# Altium PCB PCB1.PcbDoc
Units mil, origin at the board's own origin, x right, y up, seen from the top; angles counter-clockwise.
Board outline 6000 x 4000 mil, 2 copper layers (Top Layer, Bottom Layer); 190 components, 116 nets, 465 pads, 0 vias.
Unrouted connection lines stored in the file: 339.
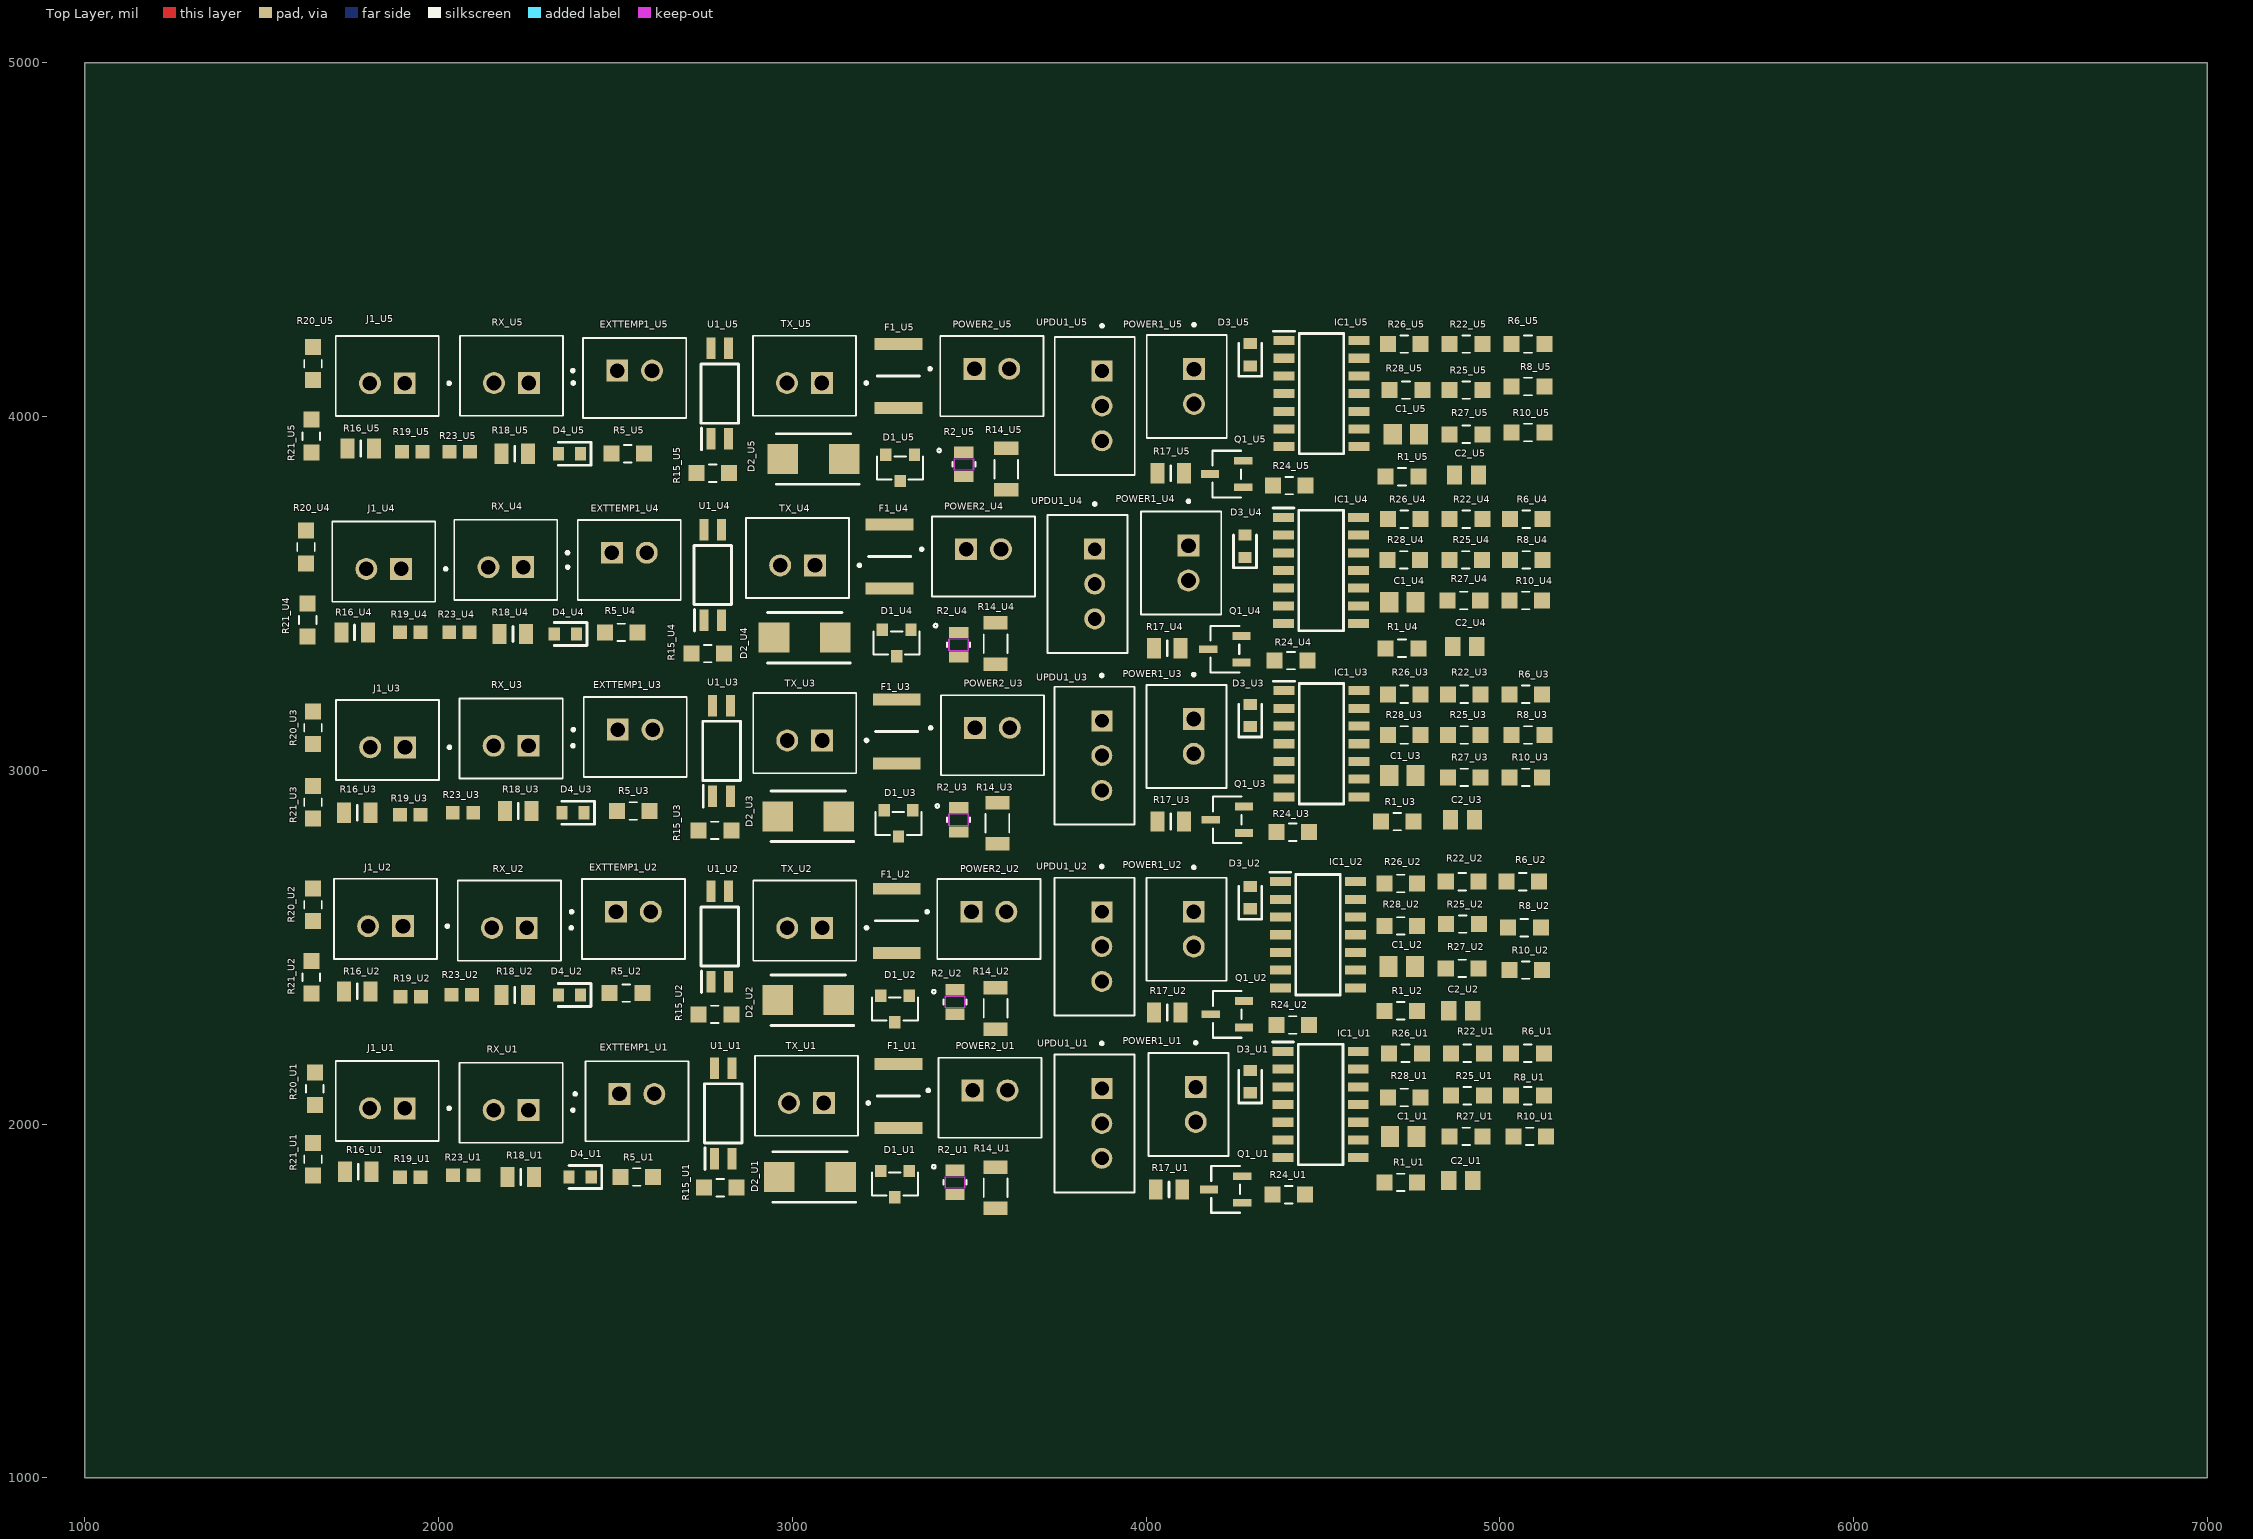
[diagram p0: Top Layer view]
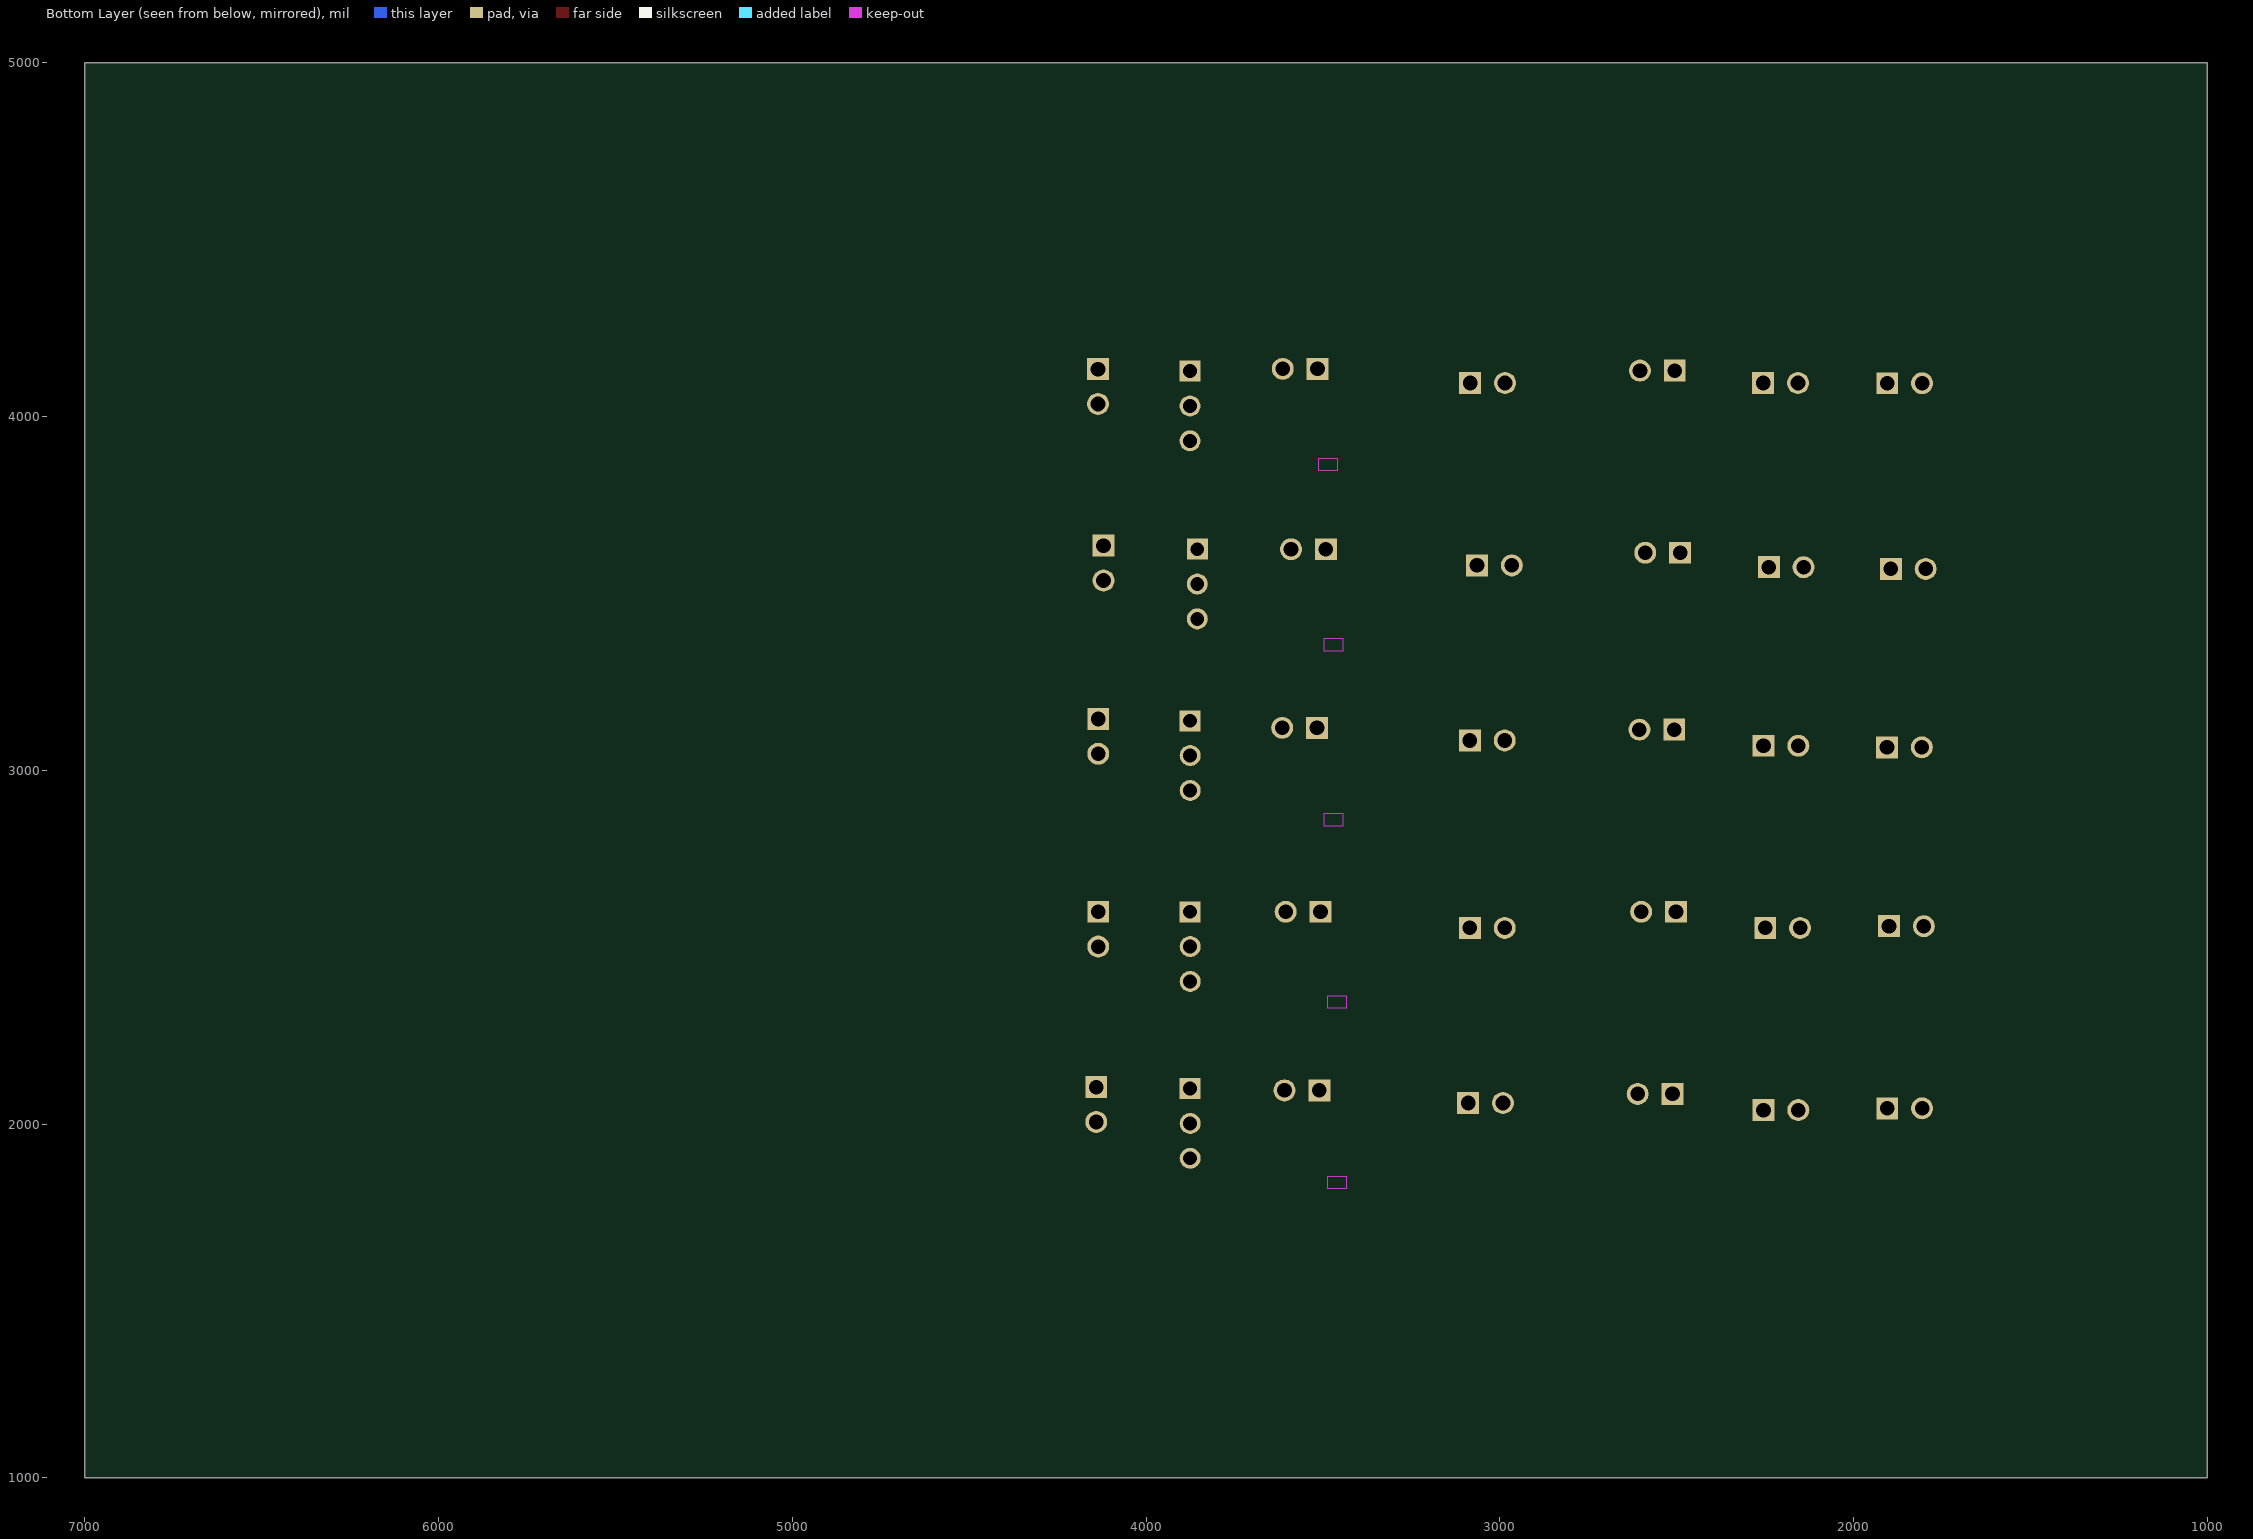
[diagram p1: Bottom Layer view, seen from below]

## Layer stack, top to bottom
Top Solder: solder mask 0.4, Solder Resist, Dk 3.5
Top Layer: signal copper 1.4
Dielectric 1: dielectric 12.6, FR-4, Dk 4.8
Bottom Layer: signal copper 1.4
Bottom Solder: solder mask 0.4, Solder Resist, Dk 3.5

## Board outline
1000,1000 7000,1000 7000,5000 1000,5000

## Design rules (kind name [scope] priority, off if disabled: settings)
Clearance [All] p1: gap=10 ignorepadtopadclearanceinfootprint=FALSE except(0: Arc-Hole Track-Hole SMDPad-Hole THPad-Hole Via-Hole Fill-Hole Poly-Hole Region-Hole Text-Hole)
PolygonConnect [All] p1: connectstyle=Relief reliefconductorwidth=10 reliefentries=4 polygonreliefangle="90 Angle" airgapwidth=10
RoutingVias [All] p1: holewidth=28 width=50 viastyle="Through Hole" minholewidth=28 minwidth=50 maxholewidth=28 maxwidth=50
SolderMaskExpansion [All] p1: expansion=4 istentingtop=FALSE
Width [All] p1: maxlimit=10 minlimit=10 preferedwidth=10
30 further rules are at their usual default settings.

## Classes and differential pairs
channel class "Single cell module": U1 U2 U3 U4 U5

## Components (designator, comment, footprint, x,y, rotation, side; value= is the part's Value field where it differs from the comment)
C1_U1 "CC0805KRX7R9BB104" CAPC2012X70 4727.6,1965 r180 top (schematic designator C1)
C1_U2 "CC0805KRX7R9BB104" CAPC2012X70 4722.6,2445 r180 top (schematic designator C1)
C1_U3 "CC0805KRX7R9BB104" CAPC2012X70 4725,2985 r180 top (schematic designator C1)
C1_U4 "CC0805KRX7R9BB104" CAPC2012X70 4725,3475 r180 top (schematic designator C1)
C1_U5 "CC0805KRX7R9BB104" CAPC2012X70 4735,3950 r180 top (schematic designator C1)
C2_U1 "CL21A106KAYNNNE" CAPC2012X135N 4890,1840 r180 top (schematic designator C2)
C2_U2 "CL21A106KAYNNNE" CAPC2012X135N 4890,2320 r180 top (schematic designator C2)
C2_U3 "CL21A106KAYNNNE" CAPC2012X135N 4895,2860 r180 top (schematic designator C2)
C2_U4 "CL21A106KAYNNNE" CAPC2012X135N 4901.02,3350 r180 top (schematic designator C2)
C2_U5 "CL21A106KAYNNNE" CAPC2012X135N 4906.02,3835 r180 top (schematic designator C2)
D1_U1 "AZ432ANTR-E1" SOT-23_DIO 3290,1830 r180 top (schematic designator D1)
D1_U2 "AZ432ANTR-E1" SOT-23_DIO 3290,2325 r180 top (schematic designator D1)
D1_U3 "AZ432ANTR-E1" SOT-23_DIO 3300,2850 r180 top (schematic designator D1)
D1_U4 "AZ432ANTR-E1" SOT-23_DIO 3295,3360 r180 top (schematic designator D1)
D1_U5 "AZ432ANTR-E1" SOT-23_DIO 3305,3855 r180 top (schematic designator D1)
D2_U1 "SM6T6V8A" DIOM5436X265N 3050,1850 r180 top (schematic designator D2)
D2_U2 "SM6T6V8A" DIOM5436X265N 3045,2350 r180 top (schematic designator D2)
D2_U3 "SM6T6V8A" DIOM5436X265N 3045,2870 r180 top (schematic designator D2)
D2_U4 "SM6T6V8A" DIOM5436X265N 3035,3375 r180 top (schematic designator D2)
D2_U5 "SM6T6V8A" DIOM5436X265N 3060,3880 r180 top (schematic designator D2)
D3_U1 "19-217_GHC-YR1S2_3T" LEDC1608X50N 4295,2120 r90 top (schematic designator D3)
D3_U2 "19-217_GHC-YR1S2_3T" LEDC1608X50N 4295,2640 r90 top (schematic designator D3)
D3_U3 "19-217_GHC-YR1S2_3T" LEDC1608X50N 4295,3155 r90 top (schematic designator D3)
D3_U4 "19-217_GHC-YR1S2_3T" LEDC1608X50N 4280,3633.5 r90 top (schematic designator D3)
D3_U5 "19-217_GHC-YR1S2_3T" LEDC1608X50N 4295,4175 r90 top (schematic designator D3)
D4_U1 "19-217_GHC-YR1S2_3T" LEDC1608X50N 2400,1850 r180 top (schematic designator D4)
D4_U2 "19-217_GHC-YR1S2_3T" LEDC1608X50N 2370,2365 r180 top (schematic designator D4)
D4_U3 "19-217_GHC-YR1S2_3T" LEDC1608X50N 2380,2880 r180 top (schematic designator D4)
D4_U4 "19-217_GHC-YR1S2_3T" LEDC1608X50N 2358.5,3385 r180 top (schematic designator D4)
D4_U5 "19-217_GHC-YR1S2_3T" LEDC1608X50N 2370,3895 r180 top (schematic designator D4)
EXTTEMP1_U1 "B2B-XH-A(LF)(SN)" JST_B2B-XH-A(LF)(SN) 2560.79,2064.33 r180 top (schematic designator EXTTEMP1)
EXTTEMP1_U2 "B2B-XH-A(LF)(SN)" JST_B2B-XH-A(LF)(SN) 2550.79,2579.33 r180 top (schematic designator EXTTEMP1)
EXTTEMP1_U3 "B2B-XH-A(LF)(SN)" JST_B2B-XH-A(LF)(SN) 2555.79,3094.33 r180 top (schematic designator EXTTEMP1)
EXTTEMP1_U4 "B2B-XH-A(LF)(SN)" JST_B2B-XH-A(LF)(SN) 2539.21,3594.33 r180 top (schematic designator EXTTEMP1)
EXTTEMP1_U5 "B2B-XH-A(LF)(SN)" JST_B2B-XH-A(LF)(SN) 2554.21,4109.33 r180 top (schematic designator EXTTEMP1)
F1_U1 "MF-MSMF150-2" FUSC4632X85N 3300,2079.45 r90 top (schematic designator F1)
F1_U2 "MF-MSMF150-2" FUSC4632X85N 3295,2574.45 r90 top (schematic designator F1)
F1_U3 "MF-MSMF150-2" FUSC4632X85N 3295,3109.45 r90 top (schematic designator F1)
F1_U4 "MF-MSMF150-2" FUSC4632X85N 3275,3604.45 r90 top (schematic designator F1)
F1_U5 "MF-MSMF150-2" FUSC4632X85N 3300,4115 r90 top (schematic designator F1)
IC1_U1 "ATTINY1624-SSU" SOIC127P600X175-14N 4493.7,2055 r0 top (schematic designator IC1)
IC1_U2 "ATTINY1624-SSU" SOIC127P600X175-14N 4486.3,2535 r0 top (schematic designator IC1)
IC1_U3 "ATTINY1624-SSU" SOIC127P600X175-14N 4496.3,3075 r0 top (schematic designator IC1)
IC1_U4 "ATTINY1624-SSU" SOIC127P600X175-14N 4495,3565 r0 top (schematic designator IC1)
IC1_U5 "ATTINY1624-SSU" SOIC127P600X175-14N 4496.3,4065 r0 top (schematic designator IC1)
J1_U1 "B2B-XH-A(LF)(SN)" JST_B2B-XH-A(LF)(SN) 1855,2065 r0 top (schematic designator J1)
J1_U2 "B2B-XH-A(LF)(SN)" JST_B2B-XH-A(LF)(SN) 1850,2580 r0 top (schematic designator J1)
J1_U3 "B2B-XH-A(LF)(SN)" JST_B2B-XH-A(LF)(SN) 1855.79,3085.67 r0 top (schematic designator J1)
J1_U4 "B2B-XH-A(LF)(SN)" JST_B2B-XH-A(LF)(SN) 1845,3590 r0 top (schematic designator J1)
J1_U5 "B2B-XH-A(LF)(SN)" JST_B2B-XH-A(LF)(SN) 1855,4115 r0 top (schematic designator J1)
POWER1_U1 "B2B-XH-A(LF)(SN)" JST_B2B-XH-A(LF)(SN) 4120,2055 r90 top (schematic designator POWER1)
POWER1_U2 "B2B-XH-A(LF)(SN)" JST_B2B-XH-A(LF)(SN) 4114.33,2550.79 r90 top (schematic designator POWER1)
POWER1_U3 "B2B-XH-A(LF)(SN)" JST_B2B-XH-A(LF)(SN) 4114.33,3095.79 r90 top (schematic designator POWER1)
POWER1_U4 "B2B-XH-A(LF)(SN)" JST_B2B-XH-A(LF)(SN) 4099.33,3585.79 r90 top (schematic designator POWER1)
POWER1_U5 "B2B-XH-A(LF)(SN)" JST_B2B-XH-A(LF)(SN) 4115,4085 r90 top (schematic designator POWER1)
POWER2_U1 "B2B-XH-A(LF)(SN)" JST_B2B-XH-A(LF)(SN) 3559.21,2074.33 r180 top (schematic designator POWER2)
POWER2_U2 "B2B-XH-A(LF)(SN)" JST_B2B-XH-A(LF)(SN) 3555.79,2579.33 r180 top (schematic designator POWER2)
POWER2_U3 "B2B-XH-A(LF)(SN)" JST_B2B-XH-A(LF)(SN) 3565.79,3099.33 r180 top (schematic designator POWER2)
POWER2_U4 "B2B-XH-A(LF)(SN)" JST_B2B-XH-A(LF)(SN) 3540.79,3604.33 r180 top (schematic designator POWER2)
POWER2_U5 "B2B-XH-A(LF)(SN)" JST_B2B-XH-A(LF)(SN) 3564.21,4114.33 r180 top (schematic designator POWER2)
Q1_U1 "AO3400A" SOT-23-3L_AOS 4225,1815 r90 top (schematic designator Q1)
Q1_U2 "AO3400A" SOT-23-3L_AOS 4230,2310 r90 top (schematic designator Q1)
Q1_U3 "AO3400A" SOT-23-3L_AOS 4230,2860 r90 top (schematic designator Q1)
Q1_U4 "AO3400A" SOT-23-3L_AOS 4223,3342.5 r90 top (schematic designator Q1)
Q1_U5 "AO3400A" SOT-23-3L_AOS 4228,3837.5 r90 top (schematic designator Q1)
R1_U1 "ERA6ARW104V" RES_ERA6ARW104V 4720,1835 r180 top (schematic designator R1)
R1_U2 "ERA6ARW104V" RES_ERA6ARW104V 4720,2320 r180 top (schematic designator R1)
R1_U3 "ERA6ARW104V" RES_ERA6ARW104V 4710,2855 r180 top (schematic designator R1)
R1_U4 "ERA6ARW104V" RES_ERA6ARW104V 4723.74,3345 r180 top (schematic designator R1)
R1_U5 "ERA6ARW104V" RES_ERA6ARW104V 4723.74,3830 r180 top (schematic designator R1)
R2_U1 "0805W8F1001T5E" RES_8F1001T5E_UNR 3460,1835 r90 top (schematic designator R2)
R2_U2 "0805W8F1001T5E" RES_8F1001T5E_UNR 3460,2345 r90 top (schematic designator R2)
R2_U3 "0805W8F1001T5E" RES_8F1001T5E_UNR 3470,2860 r90 top (schematic designator R2)
R2_U4 "0805W8F1001T5E" RES_8F1001T5E_UNR 3470,3355 r90 top (schematic designator R2)
R2_U5 "0805W8F1001T5E" RES_8F1001T5E_UNR 3485,3865 r90 top (schematic designator R2)
R5_U1 "ERJ6ENF1800V" RES_ERJ6ENF1800V 2560,1850 r180 top (schematic designator R5)
R5_U2 "ERJ6ENF1800V" RES_ERJ6ENF1800V 2530,2370 r180 top (schematic designator R5)
R5_U3 "ERJ6ENF1800V" RES_ERJ6ENF1800V 2550,2885 r180 top (schematic designator R5)
R5_U4 "ERJ6ENF1800V" RES_ERJ6ENF1800V 2516.26,3390 r180 top (schematic designator R5)
R5_U5 "ERJ6ENF1800V" RES_ERJ6ENF1800V 2535,3895 r180 top (schematic designator R5)
R6_U1 "ERA6ARW104V" RES_ERA6ARW104V 5078.74,2200 r0 top (schematic designator R6)
R6_U2 "ERA6ARW104V" RES_ERA6ARW104V 5065,2685 r0 top (schematic designator R6)
R6_U3 "ERA6ARW104V" RES_ERA6ARW104V 5073.74,3215 r0 top (schematic designator R6)
R6_U4 "ERA6ARW104V" RES_ERA6ARW104V 5075,3710 r0 top (schematic designator R6)
R6_U5 "ERA6ARW104V" RES_ERA6ARW104V 5080,4205 r0 top (schematic designator R6)
R8_U1 "ERA6ARW104V" RES_ERA6ARW104V 5078.74,2080 r180 top (schematic designator R8)
R8_U2 "ERA6ARW104V" RES_ERA6ARW104V 5070,2555 r180 top (schematic designator R8)
R8_U3 "ERA6ARW104V" RES_ERA6ARW104V 5080,3100 r180 top (schematic designator R8)
R8_U4 "ERA6ARW104V" RES_ERA6ARW104V 5075,3595 r180 top (schematic designator R8)
R8_U5 "ERA6ARW104V" RES_ERA6ARW104V 5080,4085 r180 top (schematic designator R8)
R10_U1 "ERA6ARW104V" RES_ERA6ARW104V 5085,1965 r180 top (schematic designator R10)
R10_U2 "ERA6ARW104V" RES_ERA6ARW104V 5073.74,2435 r180 top (schematic designator R10)
R10_U3 "ERA6ARW104V" RES_ERA6ARW104V 5073.74,2980 r180 top (schematic designator R10)
R10_U4 "ERA6ARW104V" RES_ERA6ARW104V 5073.74,3480 r180 top (schematic designator R10)
R10_U5 "ERA6ARW104V" RES_ERA6ARW104V 5080,3955 r180 top (schematic designator R10)
R14_U1 "RT1206DRD07510RL" RESC3116X65N 3575,1820 r90 top (schematic designator R14)
R14_U2 "RT1206DRD07510RL" RESC3116X65N 3575,2326.73 r90 top (schematic designator R14)
R14_U3 "RT1206DRD07510RL" RESC3116X65N 3580,2850 r90 top (schematic designator R14)
R14_U4 "RT1206DRD07510RL" RESC3116X65N 3575,3358.27 r90 top (schematic designator R14)
R14_U5 "RT1206DRD07510RL" RESC3116X65N 3605,3851.73 r90 top (schematic designator R14)
R15_U1 "ERJP06D1002V" RES_ERJP06D1002V 2796.26,1820 r180 top (schematic designator R15)
R15_U2 "ERJP06D1002V" RES_ERJP06D1002V 2781.26,2310 r180 top (schematic designator R15)
R15_U3 "ERJP06D1002V" RES_ERJP06D1002V 2781.26,2830 r180 top (schematic designator R15)
R15_U4 "ERJP06D1002V" RES_ERJP06D1002V 2761.26,3330 r180 top (schematic designator R15)
R15_U5 "ERJP06D1002V" RES_ERJP06D1002V 2775,3840 r180 top (schematic designator R15)
R16_U1 "0805W8F2201T5E" RESC2013X65N 1772.6,1865 r0 top (schematic designator R16)
R16_U2 "0805W8F2201T5E" RESC2013X65N 1770,2375 r0 top (schematic designator R16)
R16_U3 "0805W8F2201T5E" RESC2013X65N 1770,2880 r0 top (schematic designator R16)
R16_U4 "0805W8F2201T5E" RESC2013X65N 1762.6,3390 r0 top (schematic designator R16)
R16_U5 "0805W8F2201T5E" RESC2013X65N 1780,3910 r0 top (schematic designator R16)
R17_U1 "0805W8F2201T5E" RESC2013X65N 4065,1815 r180 top (schematic designator R17)
R17_U2 "0805W8F2201T5E" RESC2013X65N 4060,2315 r180 top (schematic designator R17)
R17_U3 "0805W8F2201T5E" RESC2013X65N 4070,2855 r180 top (schematic designator R17)
R17_U4 "0805W8F2201T5E" RESC2013X65N 4060,3345 r180 top (schematic designator R17)
R17_U5 "0805W8F2201T5E" RESC2013X65N 4070,3840 r180 top (schematic designator R17)
R18_U1 "0805W8F2201T5E" RESC2013X65N 2232.4,1850 r180 top (schematic designator R18)
R18_U2 "0805W8F2201T5E" RESC2013X65N 2215,2365 r180 top (schematic designator R18)
R18_U3 "0805W8F2201T5E" RESC2013X65N 2225,2885 r180 top (schematic designator R18)
R18_U4 "0805W8F2201T5E" RESC2013X65N 2210,3385 r180 top (schematic designator R18)
R18_U5 "0805W8F2201T5E" RESC2013X65N 2215,3895 r180 top (schematic designator R18)
R19_U1 "NCP18WF104J03RB" THRMC1608X95N 1920,1850 r0 top (schematic designator R19)
R19_U2 "NCP18WF104J03RB" THRMC1608X95N 1921.06,2360 r0 top (schematic designator R19)
R19_U3 "NCP18WF104J03RB" THRMC1608X95N 1920,2875 r0 top (schematic designator R19)
R19_U4 "NCP18WF104J03RB" THRMC1608X95N 1920,3390 r0 top (schematic designator R19)
R19_U5 "NCP18WF104J03RB" THRMC1608X95N 1925,3900 r0 top (schematic designator R19)
R20_U1 "ERJP06D1002V" RES_ERJP06D1002V 1650,2100 r90 top (schematic designator R20)
R20_U2 "ERJP06D1002V" RES_ERJP06D1002V 1645,2620 r90 top (schematic designator R20)
R20_U3 "ERJP06D1002V" RES_ERJP06D1002V 1645,3120 r90 top (schematic designator R20)
R20_U4 "ERJP06D1002V" RES_ERJP06D1002V 1625,3631.26 r90 top (schematic designator R20)
R20_U5 "ERJP06D1002V" RES_ERJP06D1002V 1645,4150 r90 top (schematic designator R20)
R21_U1 "ERJP06D1002V" RES_ERJP06D1002V 1645,1900 r90 top (schematic designator R21)
R21_U2 "ERJP06D1002V" RES_ERJP06D1002V 1640,2415 r90 top (schematic designator R21)
R21_U3 "ERJP06D1002V" RES_ERJP06D1002V 1645,2910 r90 top (schematic designator R21)
R21_U4 "ERJP06D1002V" RES_ERJP06D1002V 1630,3425 r90 top (schematic designator R21)
R21_U5 "ERJP06D1002V" RES_ERJP06D1002V 1640,3945 r90 top (schematic designator R21)
R22_U1 "ERA6ARW104V" RES_ERA6ARW104V 4908.74,2200 r180 top (schematic designator R22)
R22_U2 "ERA6ARW104V" RES_ERA6ARW104V 4893.74,2685 r180 top (schematic designator R22)
R22_U3 "ERA6ARW104V" RES_ERA6ARW104V 4900,3215 r180 top (schematic designator R22)
R22_U4 "ERA6ARW104V" RES_ERA6ARW104V 4905,3710 r180 top (schematic designator R22)
R22_U5 "ERA6ARW104V" RES_ERA6ARW104V 4905,4205 r180 top (schematic designator R22)
R23_U1 "NCP18WF104J03RB" THRMC1608X95N 2070,1855 r180 top (schematic designator R23)
R23_U2 "NCP18WF104J03RB" THRMC1608X95N 2065,2365 r180 top (schematic designator R23)
R23_U3 "NCP18WF104J03RB" THRMC1608X95N 2068.94,2880 r180 top (schematic designator R23)
R23_U4 "NCP18WF104J03RB" THRMC1608X95N 2058.94,3390 r180 top (schematic designator R23)
R23_U5 "NCP18WF104J03RB" THRMC1608X95N 2060,3900 r180 top (schematic designator R23)
R24_U1 "ERA6ARW104V" RES_ERA6ARW104V 4403.74,1800 r180 top (schematic designator R24)
R24_U2 "ERA6ARW104V" RES_ERA6ARW104V 4415,2280 r180 top (schematic designator R24)
R24_U3 "ERA6ARW104V" RES_ERA6ARW104V 4415,2825 r180 top (schematic designator R24)
R24_U4 "ERA6ARW104V" RES_ERA6ARW104V 4410,3310 r180 top (schematic designator R24)
R24_U5 "ERA6ARW104V" RES_ERA6ARW104V 4405,3805 r0 top (schematic designator R24)
R25_U1 "ERA6ARW104V" RES_ERA6ARW104V 4908.74,2080 r180 top (schematic designator R25)
R25_U2 "ERA6ARW104V" RES_ERA6ARW104V 4895,2565 r180 top (schematic designator R25)
R25_U3 "ERA6ARW104V" RES_ERA6ARW104V 4900,3100 r180 top (schematic designator R25)
R25_U4 "ERA6ARW104V" RES_ERA6ARW104V 4903.74,3595 r180 top (schematic designator R25)
R25_U5 "ERA6ARW104V" RES_ERA6ARW104V 4905,4075 r180 top (schematic designator R25)
R26_U1 "ERA6ARW104V" RES_ERA6ARW104V 4733.74,2200 r180 top (schematic designator R26)
R26_U2 "ERA6ARW104V" RES_ERA6ARW104V 4720,2680 r180 top (schematic designator R26)
R26_U3 "ERA6ARW104V" RES_ERA6ARW104V 4730,3215 r180 top (schematic designator R26)
R26_U4 "ERA6ARW104V" RES_ERA6ARW104V 4730,3710 r180 top (schematic designator R26)
R26_U5 "ERA6ARW104V" RES_ERA6ARW104V 4730,4205 r180 top (schematic designator R26)
R27_U1 "ERA6ARW104V" RES_ERA6ARW104V 4905,1965 r180 top (schematic designator R27)
R27_U2 "ERA6ARW104V" RES_ERA6ARW104V 4893.74,2440 r180 top (schematic designator R27)
R27_U3 "ERA6ARW104V" RES_ERA6ARW104V 4900,2980 r180 top (schematic designator R27)
R27_U4 "ERA6ARW104V" RES_ERA6ARW104V 4898.74,3480 r180 top (schematic designator R27)
R27_U5 "ERA6ARW104V" RES_ERA6ARW104V 4905,3950 r180 top (schematic designator R27)
R28_U1 "ERA6ARW104V" RES_ERA6ARW104V 4730,2075 r180 top (schematic designator R28)
R28_U2 "ERA6ARW104V" RES_ERA6ARW104V 4720,2560 r180 top (schematic designator R28)
R28_U3 "ERA6ARW104V" RES_ERA6ARW104V 4730,3100 r180 top (schematic designator R28)
R28_U4 "ERA6ARW104V" RES_ERA6ARW104V 4728.74,3595 r180 top (schematic designator R28)
R28_U5 "ERA6ARW104V" RES_ERA6ARW104V 4735,4075 r180 top (schematic designator R28)
RX_U1 "B2B-XH-A(LF)(SN)" JST_B2B-XH-A(LF)(SN) 2205,2060 r0 top (schematic designator RX)
RX_U2 "B2B-XH-A(LF)(SN)" JST_B2B-XH-A(LF)(SN) 2200,2575 r0 top (schematic designator RX)
RX_U3 "B2B-XH-A(LF)(SN)" JST_B2B-XH-A(LF)(SN) 2205,3090 r0 top (schematic designator RX)
RX_U4 "B2B-XH-A(LF)(SN)" JST_B2B-XH-A(LF)(SN) 2190,3595 r0 top (schematic designator RX)
RX_U5 "B2B-XH-A(LF)(SN)" JST_B2B-XH-A(LF)(SN) 2205.79,4115.67 r0 top (schematic designator RX)
TX_U1 "B2B-XH-A(LF)(SN)" JST_B2B-XH-A(LF)(SN) 3040,2080 r0 top (schematic designator TX)
TX_U2 "B2B-XH-A(LF)(SN)" JST_B2B-XH-A(LF)(SN) 3035,2575 r0 top (schematic designator TX)
TX_U3 "B2B-XH-A(LF)(SN)" JST_B2B-XH-A(LF)(SN) 3035,3105 r0 top (schematic designator TX)
TX_U4 "B2B-XH-A(LF)(SN)" JST_B2B-XH-A(LF)(SN) 3015,3600 r0 top (schematic designator TX)
TX_U5 "B2B-XH-A(LF)(SN)" JST_B2B-XH-A(LF)(SN) 3034.21,4115.67 r0 top (schematic designator TX)
U1_U1 "EL3H7_B__TA_-G" SOIC127P700X200-4N 2805,2030 r90 top (schematic designator U1)
U1_U2 "EL3H7_B__TA_-G" SOIC127P700X200-4N 2795,2530 r90 top (schematic designator U1)
U1_U3 "EL3H7_B__TA_-G" SOIC127P700X200-4N 2800,3055 r90 top (schematic designator U1)
U1_U4 "EL3H7_B__TA_-G" SOIC127P700X200-4N 2775,3552.05 r90 top (schematic designator U1)
U1_U5 "EL3H7_B__TA_-G" SOIC127P700X200-4N 2795,4065 r90 top (schematic designator U1)
UPDU1_U1 "B3B-XH-A_(LF)(SN)" "JST_B3B-XH-A (LF)(SN)" 3854.33,2001.57 r90 top (schematic designator UPDU1)
UPDU1_U2 "B3B-XH-A_(LF)(SN)" "JST_B3B-XH-A (LF)(SN)" 3854.33,2501.57 r90 top (schematic designator UPDU1)
UPDU1_U3 "B3B-XH-A_(LF)(SN)" "JST_B3B-XH-A (LF)(SN)" 3854.33,3041.57 r90 top (schematic designator UPDU1)
UPDU1_U4 "B3B-XH-A_(LF)(SN)" "JST_B3B-XH-A (LF)(SN)" 3834.33,3526.57 r90 top (schematic designator UPDU1)
UPDU1_U5 "B3B-XH-A_(LF)(SN)" "JST_B3B-XH-A (LF)(SN)" 3855,4030 r90 top (schematic designator UPDU1)

## Footprints (in the part's own frame and the unit in brackets; to place one, negate y for a bottom-side part, rotate by r counter-clockwise, add the part's x,y. Pads: shape width x height; smd on the part's side, far side on the other; paste and mask are expansions set on the pad)
CAPC2012X70 [mm]
  rect 1.3x1.5 smd: 1(-0.95,0) 2(0.95,0)
CAPC2012X135N [mm]
  rect 1.1x1.38 smd: 1(-0.863,0) 2(0.863,0)
DIOM5436X265N [mm]
  rect 2.2x2.15 smd: 1(-2.2,0) 2(2.2,0)
  silkscreen extent -3.27,-1.81 2.68,1.81, body extent -2.68,-1.86 2.68,1.86, height 2.33
FUSC4632X85N [mm]
  rect 0.85x3.43 smd: 1(-2.3,0) 2(2.3,0)
  silkscreen extent 0,-1.52 0,1.52, body extent -2.27,-1.62 2.27,1.62, height 0.85
JST_B2B-XH-A(LF)(SN) [mm]
  rect 1.575x1.575 / inner round 1.575 / far side rect 1.575x1.575 hole 1.05: 1(1.25,-0.525)
  round 1.575 hole 1.05: 2(-1.25,-0.525)
  silkscreen extent -3.7,-2.88 4.54,2.88, body extent -3.7,-2.88 3.7,2.88, height 7
"JST_B3B-XH-A (LF)(SN)" [mm]
  rect 1.508x1.508 / inner round 1.508 / far side rect 1.508x1.508 hole 1: 1(2.5,-0.525)
  round 1.508 hole 1: 2(0,-0.525) 3(-2.5,-0.525)
  silkscreen extent -4.95,-2.88 5.85,2.88, body extent -4.95,-2.88 4.95,2.88, height 7
LEDC1608X50N [mm]
  rect 0.8x0.95 smd: 1(-0.8,0) 2(0.8,0)
  silkscreen extent -1.55,-0.82 0.8,0.82, body extent -0.82,-0.4 0.82,0.4, height 0.4
RES_8F1001T5E_UNR [mil]
  rect 32x55 smd paste+0 mask+0: 1(-34.5,0) 2(34.5,0)
  Top Layer keep-out region: -16.5,-25.5 -16.5,25.5 16.5,25.5 16.5,-25.5
  Keep-Out Layer region: -16.5,-27.5 -16.5,27.5 16.5,27.5 16.5,-27.5
  silkscreen extent -6,-32 6,32, body extent -43,-27 43,27, height 26
RES_ERA6ARW104V [mm]
  rect 1.15x1.15 smd: 1(-1.175,0) 2(1.175,0)
  silkscreen extent -0.28,-0.63 0.28,0.63
RES_ERJ6ENF1800V [mm]
  rect 1.15x1.15 smd: 1(-1.175,0) 2(1.175,0)
  silkscreen extent -0.28,-0.63 0.28,0.63
RES_ERJP06D1002V [mm]
  rect 1.15x1.15 smd: 1(-1.175,0) 2(1.175,0)
  silkscreen extent -0.28,-0.63 0.28,0.63
RESC2013X65N [mm]
  rect 1x1.45 smd: 1(-0.95,0) 2(0.95,0)
  silkscreen extent 0,-0.54 0,0.54, body extent -1,-0.64 1,0.64, height 0.65
RESC3116X65N [mm]
  rect 0.97x1.73 smd: 1(-1.48,0) 2(1.48,0)
  silkscreen extent -0.67,-0.85 0.67,0.85
SOIC127P600X175-14N [mm]
  rect 1.5x0.65 smd: 1(-2.7,3.81) 2(-2.7,2.54) 3(-2.7,1.27) 4(-2.7,0) 5(-2.7,-1.27) 6(-2.7,-2.54) 7(-2.7,-3.81) 8(2.7,-3.81) 9(2.7,-2.54) 10(2.7,-1.27) 11(2.7,0) 12(2.7,1.27) 13(2.7,2.54) 14(2.7,3.81)
  silkscreen extent -3.45,-4.33 1.6,4.48, body extent -3,-4.33 3,4.33, height 1.75
SOIC127P700X200-4N [mm]
  rect 1.55x0.65 smd: 1(-3.25,0.635) 2(-3.25,-0.635) 3(3.25,-0.635) 4(3.25,0.635)
  silkscreen extent -4.03,-1.35 2.12,1.35, body extent -3.5,-1.35 3.5,1.35, height 2
SOT-23-3L_AOS [mil]
  rect 22x52 smd paste+0 mask+0: 1(-37.5,-47) 2(37.5,-47) 3(0,47)
  silkscreen extent -66,-41 66,41, body extent -61,-59 61,59, height 49
SOT-23_DIO [mil]
  rect 32x35 smd paste+0 mask+0: 1(-40.35,-37.2) 2(40.35,-37.2) 3(0,37.2)
  silkscreen extent -115,-54 65,33
THRMC1608X95N [mm]
  rect 1x0.97 smd: 1(-0.735,0) 2(0.735,0)
  body extent -0.8,-0.4 0.8,0.4, height 0.95

## Part data
C1_U1 C1_U2 C1_U3 C1_U4 C1_U5: "0.1ÂµF Â±10% 50V Ceramic Capacitor X7R 0805 _2012 Metric_", Package="0805 Yageo", Availability=Unavailable, MF=Yageo, MP=CC0805KRX7R9BB104, Price=None, SnapEDA_Link=https://www.snapeda.com/parts/CC0805KRX7R9BB104/Yageo/view-part/105548/?ref=snap
C2_U1 C2_U2 C2_U3 C2_U4 C2_U5: "10ÂµF Â±10% 25V Ceramic Capacitor X5R 0805 (2012 Metric)", Package="0805 Samsung", Check_prices=https://www.snapeda.com/parts/CL21A106KAYNNNE/Samsung/view-part/3598482/?ref=eda, Digi-Key_Part_Number=1276-2891-1-ND, MF=Samsung, MP=CL21A106KAYNNNE, SnapEDA_Link=https://www.snapeda.com/parts/CL21A106KAYNNNE/Samsung/view-part/3598482/?ref=snap
D1_U1 D1_U2 D1_U3 D1_U4 D1_U5: "No Description Available", Mfr_Name="Diodes Inc", RefDes=RefDes, Type=Type
D2_U1 D2_U2 D2_U3 D2_U4 D2_U5: "TVS Diode (Uni-directional)", Manufacturer_Name=STMicroelectronics, Mouser Part Number=511-SM6T6V8A, Arrow Part Number=SM6T6V8A, Arrow Price/Stock=https://www.arrow.com/en/products/sm6t6v8a/stmicroelectronics?region=nac, Datasheet Link=https://www.st.com/resource/en/datasheet/sm6t100a.pdf, Height=2.65mm, Manufacturer_Part_Number=SM6T6V8A, Mouser Price/Stock=https://www.mouser.co.uk/ProductDetail/STMicroelectronics/SM6T6V8A?qs=gFQxgRPje42DFJYRsrsouA%3D%3D
D3_U1 D3_U2 D3_U3 D3_U4 D3_U5 D4_U1 D4_U2 D4_U3 D4_U4 D4_U5: "LED", Arrow Part Number=19-217/GHC-YR1S2/3T, Manufacturer_Name=Everlight, Mouser Part Number=638-19217GHCYR1S23T, Arrow Price/Stock=https://www.arrow.com/en/products/19-217ghc-yr1s23t/everlight-electronics, Datasheet Link=https://www.mouser.co.uk/datasheet/2/143/19-217-GHC-YR1S2-3T-1663276.pdf, Height=0.5mm, Manufacturer_Part_Number=19-217/GHC-YR1S2/3T, Mouser Price/Stock=https://www.mouser.co.uk/ProductDetail/Everlight/19-217-GHC-YR1S2-3T?qs=8cKuZ6Ok2lZjmFTUzVFjDg%3D%3D
EXTTEMP1_U1 EXTTEMP1_U2 EXTTEMP1_U3 EXTTEMP1_U4 EXTTEMP1_U5 J1_U1 J1_U2 J1_U3 J1_U4 J1_U5 POWER1_U1 POWER1_U2 POWER1_U3 POWER1_U4 POWER1_U5 POWER2_U1 POWER2_U2 POWER2_U3 POWER2_U4 POWER2_U5 RX_U1 RX_U2 RX_U3 RX_U4 RX_U5 TX_U1 TX_U2 TX_U3 TX_U4 TX_U5: "Connector Header Through Hole 2 position 0.098 (2.50mm)", Package=None, Check_prices=https://www.snapeda.com/parts/B2B-XH-A(LF)(SN)/JST+Sales+America+Inc./view-part/?ref=eda, MF="JST Sales America Inc.", MP=B2B-XH-A(LF)(SN), SnapEDA_Link=https://www.snapeda.com/parts/B2B-XH-A(LF)(SN)/JST+Sales+America+Inc./view-part/?ref=snap
F1_U1 F1_U2 F1_U3 F1_U4 F1_U5: "Fuse", Manufacturer_Name=Bourns, Mouser Part Number=652-MF-MSMF150-2, Arrow Part Number=MF-MSMF150-2, Arrow Price/Stock=https://www.arrow.com/en/products/mf-msmf150-2/bourns?region=nac, Datasheet Link=https://componentsearchengine.com/Datasheets/2/MF-MSMF150-2.pdf, Height=0.85mm, Manufacturer_Part_Number=MF-MSMF150-2, Mouser Price/Stock=https://www.mouser.co.uk/ProductDetail/Bourns/MF-MSMF150-2?qs=VJkZAnU6DY2RTCSZT8Bxqg%3D%3D
IC1_U1 IC1_U2 IC1_U3 IC1_U4 IC1_U5: "Integrated Circuit", Manufacturer_Name=Microchip, Mouser Part Number=556-ATTINY1624-SSU, Arrow Part Number=ATTINY1624-SSU, Arrow Price/Stock=https://www.arrow.com/en/products/attiny1624-ssu/microchip-technology?region=nac, Datasheet Link=https://ww1.microchip.com/downloads/en/DeviceDoc/ATtiny1624-26-27-DataSheet-DS40002234A.pdf, Height=1.75mm, Manufacturer_Part_Number=ATTINY1624-SSU, Mouser Price/Stock=https://www.mouser.co.uk/ProductDetail/Microchip-Technology/ATTINY1624-SSU?qs=vmHwEFxEFR%2FHKYGUmUC%2Fzw%3D%3D
Q1_U1 Q1_U2 Q1_U3 Q1_U4 Q1_U5: "No Description Available", Mfr_Name="Alpha and Omega Semiconductor", RefDes=RefDes, Type=Type
R1_U1 R1_U2 R1_U3 R1_U4 R1_U5 R5_U1 R5_U2 R5_U3 R5_U4 R5_U5 R6_U1 R6_U2 R6_U3 R6_U4 R6_U5 R8_U1 R8_U2 R8_U3 R8_U4 R8_U5 R10_U1 R10_U2 R10_U3 R10_U4 R10_U5 R15_U1 R15_U2 R15_U3 R15_U4 R15_U5 R20_U1 R20_U2 R20_U3 R20_U4 R20_U5 R21_U1 R21_U2 R21_U3 R21_U4 R21_U5 R22_U1 R22_U2 R22_U3 R22_U4 R22_U5 R24_U1 R24_U2 R24_U3 R24_U4 R24_U5 R25_U1 R25_U2 R25_U3 R25_U4 R25_U5 R26_U1 R26_U2 R26_U3 R26_U4 R26_U5 R27_U1 R27_U2 R27_U3 R27_U4 R27_U5 R28_U1 R28_U2 R28_U3 R28_U4 R28_U5: Package=None, Availability=Unavailable, Price=None
  R1_U1 R1_U2 R1_U3 R1_U4 R1_U5 R6_U1 R6_U2 R6_U3 R6_U4 R6_U5 R8_U1 R8_U2 R8_U3 R8_U4 R8_U5 R10_U1 R10_U2 R10_U3 R10_U4 R10_U5 R22_U1 R22_U2 R22_U3 R22_U4 R22_U5 R24_U1 R24_U2 R24_U3 R24_U4 R24_U5 R25_U1 R25_U2 R25_U3 R25_U4 R25_U5 R26_U1 R26_U2 R26_U3 R26_U4 R26_U5 R27_U1 R27_U2 R27_U3 R27_U4 R27_U5 R28_U1 R28_U2 R28_U3 R28_U4 R28_U5: MP=ERA6ARW104V
  R5_U1 R5_U2 R5_U3 R5_U4 R5_U5: MP=ERJ6ENF1800V
  R15_U1 R15_U2 R15_U3 R15_U4 R15_U5 R20_U1 R20_U2 R20_U3 R20_U4 R20_U5 R21_U1 R21_U2 R21_U3 R21_U4 R21_U5: MP=ERJP06D1002V
R2_U1 R2_U2 R2_U3 R2_U4 R2_U5: "No Description Available", Mfr_Name=Uniroyal
R14_U1 R14_U2 R14_U3 R14_U4 R14_U5: "RES SMD 510 OHM 0.5% 1/8W 1206", Package=None, Availability=Unavailable, MP=RT1206DRD07510RL, Price=None
R16_U1 R16_U2 R16_U3 R16_U4 R16_U5 R17_U1 R17_U2 R17_U3 R17_U4 R17_U5 R18_U1 R18_U2 R18_U3 R18_U4 R18_U5: "Resistor", Manufacturer_Name=ROYALOHM, Mouser Part Number=303-0805W8F2201T5E, Datasheet Link=https://www.mouser.fr/datasheet/2/1365/GeneralPurpose-2498088.pdf, Height=0.65mm, Manufacturer_Part_Number=0805W8F2201T5E, Mouser Price/Stock=https://www.mouser.co.uk/ProductDetail/Royalohm/0805W8F2201T5E?qs=e8oIoAS2J1RJNRSZp0Nryw%3D%3D
R19_U1 R19_U2 R19_U3 R19_U4 R19_U5 R23_U1 R23_U2 R23_U3 R23_U4 R23_U5: "NTC Thermistor 100k 0603 (1608 Metric)", Package="1608 Murata", Availability=Good, Check_prices=https://www.snapeda.com/parts/NCP18WF104J03RB/Murata%20Electronics%20North%20America/view-part/144301/?ref=eda, MF="Murata Electronics", MP=NCP18WF104J03RB, Price=None, Purchase-URL=https://pricing.snapeda.com/search/part/NCP18WF104J03RB/?ref=eda, SnapEDA_Link=https://www.snapeda.com/parts/NCP18WF104J03RB/Murata%20Electronics%20North%20America/view-part/144301/?ref=snap
U1_U1 U1_U2 U1_U3 U1_U4 U1_U5: "Integrated Circuit", Arrow Part Number=EL3H7(B)(TA)-G, Manufacturer_Name=Everlight, Mouser Part Number=638-EL3H7BTAG, Arrow Price/Stock=https://www.arrow.com/en/products/el3h7-b-ta-g/everlight-electronics?region=nac, Datasheet Link=https://www.arrow.com/en/products/el3h7-b-ta-g/everlight-electronics?region=nac, Height=2mm, Manufacturer_Part_Number=EL3H7(B)(TA)-G, Mouser Price/Stock=https://www.mouser.co.uk/ProductDetail/Everlight/EL3H7BTA-G?qs=8PzhAHr7IdM%252B0XGOXhFFCg%3D%3D
UPDU1_U1 UPDU1_U2 UPDU1_U3 UPDU1_U4 UPDU1_U5: "Connector Header Through Hole 3 position 0.098 (2.50mm)", Package=None, Check_prices=https://www.snapeda.com/parts/B3B-XH-A%20(LF)(SN)/JST+Sales+America+Inc./view-part/?ref=eda, MF="JST Sales America Inc.", MP="B3B-XH-A (LF)(SN)", SnapEDA_Link=https://www.snapeda.com/parts/B3B-XH-A%20(LF)(SN)/JST+Sales+America+Inc./view-part/?ref=snap

## Nets (pads, with @x,y where several pads share a name; then routed paths per layer and width w, separated by ;. In a path a pad name is that pad's centre, name@x,y a point inside that pad or via, vN(x,y) a via of type N, cw(c..) or ccw(c..) an arc to the next point about the centre after c; other vN are vias at no path point)
DUMP_LOAD_ENABLE_U1: IC1_U1.8 R14_U1.1
DUMP_LOAD_ENABLE_U2: IC1_U2.8 R14_U2.1
DUMP_LOAD_ENABLE_U3: IC1_U3.8 R14_U3.1
DUMP_LOAD_ENABLE_U4: IC1_U4.8 R14_U4.1
DUMP_LOAD_ENABLE_U5: IC1_U5.8 R14_U5.1
ENABLE_U1: EXTTEMP1_U1.2 IC1_U1.9 J1_U1.2 R19_U1.2 R23_U1.2
ENABLE_U2: EXTTEMP1_U2.2 IC1_U2.9 J1_U2.2 R19_U2.2 R23_U2.2
ENABLE_U3: EXTTEMP1_U3.2 IC1_U3.9 J1_U3.2 R19_U3.2 R23_U3.2
ENABLE_U4: EXTTEMP1_U4.2 IC1_U4.9 J1_U4.2 R19_U4.2 R23_U4.2
ENABLE_U5: EXTTEMP1_U5.2 IC1_U5.9 J1_U5.2 R19_U5.2 R23_U5.2
GND: C1_U1.1 C1_U2.1 C1_U3.1 C1_U4.1 C1_U5.1 C2_U1.2 C2_U2.2 C2_U3.2 C2_U4.2 C2_U5.2 D1_U1.3 D1_U2.3 D1_U3.3 D1_U4.3 D1_U5.3 D2_U1.2 D2_U2.2 D2_U3.2 D2_U4.2 D2_U5.2 IC1_U1.14 IC1_U2.14 IC1_U3.14 IC1_U4.14 IC1_U5.14 POWER1_U1.1 POWER1_U2.1 POWER1_U3.1 POWER1_U4.1 POWER1_U5.1 POWER2_U1.1 POWER2_U2.1 POWER2_U3.1 POWER2_U4.1 POWER2_U5.1 Q1_U1.2 Q1_U2.2 Q1_U3.2 Q1_U4.2 Q1_U5.2 R15_U1.2 R15_U2.2 R15_U3.2 R15_U4.2 R15_U5.2 R16_U1.1 R16_U2.1 R16_U3.1 R16_U4.1 R16_U5.1 R18_U1.2 R18_U2.2 R18_U3.2 R18_U4.2 R18_U5.2 R20_U1.1 R20_U2.1 R20_U3.1 R20_U4.1 R20_U5.1 R21_U1.1 R21_U2.1 R21_U3.1 R21_U4.1 R21_U5.1 U1_U1.2 U1_U2.2 U1_U3.2 U1_U4.2 U1_U5.2 UPDU1_U1.3 UPDU1_U2.3 UPDU1_U3.3 UPDU1_U4.3 UPDU1_U5.3
NetD3_U1_1: D3_U1.1 R17_U1.1
NetD3_U2_1: D3_U2.1 R17_U2.1
NetD3_U3_1: D3_U3.1 R17_U3.1
NetD3_U4_1: D3_U4.1 R17_U4.1
NetD3_U5_1: D3_U5.1 R17_U5.1
NetD4_U1_1: D4_U1.1 R18_U1.1
NetD4_U2_1: D4_U2.1 R18_U2.1
NetD4_U3_1: D4_U3.1 R18_U3.1
NetD4_U4_1: D4_U4.1 R18_U4.1
NetD4_U5_1: D4_U5.1 R18_U5.1
NetF1_U1_1: F1_U1.1 POWER1_U1.2 POWER2_U1.2
NetF1_U2_1: F1_U2.1 POWER1_U2.2 POWER2_U2.2
NetF1_U3_1: F1_U3.1 POWER1_U3.2 POWER2_U3.2
NetF1_U4_1: F1_U4.1 POWER1_U4.2 POWER2_U4.2
NetF1_U5_1: F1_U5.1 POWER1_U5.2 POWER2_U5.2
NetQ1_U1_1: Q1_U1.1 R14_U1.2 R15_U1.1
NetQ1_U1_3: Q1_U1.3 R10_U1.2 R17_U1.2 R27_U1.2 R28_U1.2
NetQ1_U2_1: Q1_U2.1 R14_U2.2 R15_U2.1
NetQ1_U2_3: Q1_U2.3 R10_U2.2 R17_U2.2 R27_U2.2 R28_U2.2
NetQ1_U3_1: Q1_U3.1 R14_U3.2 R15_U3.1
NetQ1_U3_3: Q1_U3.3 R10_U3.2 R17_U3.2 R27_U3.2 R28_U3.2
NetQ1_U4_1: Q1_U4.1 R14_U4.2 R15_U4.1
NetQ1_U4_3: Q1_U4.3 R10_U4.2 R17_U4.2 R27_U4.2 R28_U4.2
NetQ1_U5_1: Q1_U5.1 R14_U5.2 R15_U5.1
NetQ1_U5_3: Q1_U5.3 R10_U5.2 R17_U5.2 R27_U5.2 R28_U5.2
NetR5_U1_2: R5_U1.2 U1_U1.1
NetR5_U2_2: R5_U2.2 U1_U2.1
NetR5_U3_2: R5_U3.2 U1_U3.1
NetR5_U4_2: R5_U4.2 U1_U4.1
NetR5_U5_2: R5_U5.2 U1_U5.1
NetR6_U1_2: R6_U1.2 R8_U1.1
NetR6_U2_2: R6_U2.2 R8_U2.1
NetR6_U3_2: R6_U3.2 R8_U3.1
NetR6_U4_2: R6_U4.2 R8_U4.1
NetR6_U5_2: R6_U5.2 R8_U5.1
NetR8_U1_2: R8_U1.2 R10_U1.1
NetR8_U2_2: R8_U2.2 R10_U2.1
NetR8_U3_2: R8_U3.2 R10_U3.1
NetR8_U4_2: R8_U4.2 R10_U4.1
NetR8_U5_2: R8_U5.2 R10_U5.1
NetR22_U1_2: R22_U1.2 R25_U1.1
NetR22_U2_2: R22_U2.2 R25_U2.1
NetR22_U3_2: R22_U3.2 R25_U3.1
NetR22_U4_2: R22_U4.2 R25_U4.1
NetR22_U5_2: R22_U5.2 R25_U5.1
NetR24_U1_2: R24_U1.2 R26_U1.1
NetR24_U2_2: R24_U2.2 R26_U2.1
NetR24_U3_2: R24_U3.2 R26_U3.1
NetR24_U4_2: R24_U4.2 R26_U4.1
NetR24_U5_2: R24_U5.2 R26_U5.1
NetR25_U1_2: R25_U1.2 R27_U1.1
NetR25_U2_2: R25_U2.2 R27_U2.1
NetR25_U3_2: R25_U3.2 R27_U3.1
NetR25_U4_2: R25_U4.2 R27_U4.1
NetR25_U5_2: R25_U5.2 R27_U5.1
NetR26_U1_2: R26_U1.2 R28_U1.1
NetR26_U2_2: R26_U2.2 R28_U2.1
NetR26_U3_2: R26_U3.2 R28_U3.1
NetR26_U4_2: R26_U4.2 R28_U4.1
NetR26_U5_2: R26_U5.2 R28_U5.1
PA3_U1: EXTTEMP1_U1.1 IC1_U1.13 J1_U1.1 R21_U1.2 R23_U1.1
PA3_U2: EXTTEMP1_U2.1 IC1_U2.13 J1_U2.1 R21_U2.2 R23_U2.1
PA3_U3: EXTTEMP1_U3.1 IC1_U3.13 J1_U3.1 R21_U3.2 R23_U3.1
PA3_U4: EXTTEMP1_U4.1 IC1_U4.13 J1_U4.1 R21_U4.2 R23_U4.1
PA3_U5: EXTTEMP1_U5.1 IC1_U5.13 J1_U5.1 R21_U5.2 R23_U5.1
PA6_U1: D4_U1.2 IC1_U1.4
PA6_U2: D4_U2.2 IC1_U2.4
PA6_U3: D4_U3.2 IC1_U3.4
PA6_U4: D4_U4.2 IC1_U4.4
PA6_U5: D4_U5.2 IC1_U5.4
PA7_U1: IC1_U1.5 R19_U1.1 R20_U1.2
PA7_U2: IC1_U2.5 R19_U2.1 R20_U2.2
PA7_U3: IC1_U3.5 R19_U3.1 R20_U3.2
PA7_U4: IC1_U4.5 R19_U4.1 R20_U4.2
PA7_U5: IC1_U5.5 R19_U5.1 R20_U5.2
"REF EN_U1": IC1_U1.11 R2_U1.2
"REF EN_U2": IC1_U2.11 R2_U2.2
"REF EN_U3": IC1_U3.11 R2_U3.2
"REF EN_U4": IC1_U4.11 R2_U4.2
"REF EN_U5": IC1_U5.11 R2_U5.2
RESET_U1: IC1_U1.10 R1_U1.1 UPDU1_U1.2
RESET_U2: IC1_U2.10 R1_U2.1 UPDU1_U2.2
RESET_U3: IC1_U3.10 R1_U3.1 UPDU1_U3.2
RESET_U4: IC1_U4.10 R1_U4.1 UPDU1_U4.2
RESET_U5: IC1_U5.10 R1_U5.1 UPDU1_U5.2
RXDO_U1: IC1_U1.6 R16_U1.2 RX_U1.1 TX_U5.1 U1_U5.3
RXDO_U2: IC1_U2.6 R16_U2.2 RX_U2.1 TX_U1.1 U1_U1.3
RXDO_U3: IC1_U3.6 R16_U3.2 RX_U3.1 TX_U2.1 U1_U2.3
RXDO_U4: IC1_U4.6 R16_U4.2 RX_U4.1 TX_U3.1 U1_U3.3
RXDO_U5: IC1_U5.6 R16_U5.2 RX_U5.1 TX_U4.1 U1_U4.3
TXDO_U1: IC1_U1.7 R5_U1.1
TXDO_U2: IC1_U2.7 R5_U2.1
TXDO_U3: IC1_U3.7 R5_U3.1
TXDO_U4: IC1_U4.7 R5_U4.1
TXDO_U5: IC1_U5.7 R5_U5.1
VCC_U1: C1_U1.2 C2_U1.1 D2_U1.1 D3_U1.2 F1_U1.2 IC1_U1.1 R1_U1.2 R6_U1.1 R22_U1.1 R24_U1.1 RX_U1.2 TX_U5.2 U1_U5.4 UPDU1_U1.1
VCC_U2: C1_U2.2 C2_U2.1 D2_U2.1 D3_U2.2 F1_U2.2 IC1_U2.1 R1_U2.2 R6_U2.1 R22_U2.1 R24_U2.1 RX_U2.2 TX_U1.2 U1_U1.4 UPDU1_U2.1
VCC_U3: C1_U3.2 C2_U3.1 D2_U3.1 D3_U3.2 F1_U3.2 IC1_U3.1 R1_U3.2 R6_U3.1 R22_U3.1 R24_U3.1 RX_U3.2 TX_U2.2 U1_U2.4 UPDU1_U3.1
VCC_U4: C1_U4.2 C2_U4.1 D2_U4.1 D3_U4.2 F1_U4.2 IC1_U4.1 R1_U4.2 R6_U4.1 R22_U4.1 R24_U4.1 RX_U4.2 TX_U3.2 U1_U3.4 UPDU1_U4.1
VCC_U5: C1_U5.2 C2_U5.1 D2_U5.1 D3_U5.2 F1_U5.2 IC1_U5.1 R1_U5.2 R6_U5.1 R22_U5.1 R24_U5.1 RX_U5.2 TX_U4.2 U1_U4.4 UPDU1_U5.1
VREF_U1: D1_U1.1 D1_U1.2 IC1_U1.3 R2_U1.1
VREF_U2: D1_U2.1 D1_U2.2 IC1_U2.3 R2_U2.1
VREF_U3: D1_U3.1 D1_U3.2 IC1_U3.3 R2_U3.1
VREF_U4: D1_U4.1 D1_U4.2 IC1_U4.3 R2_U4.1
VREF_U5: D1_U5.1 D1_U5.2 IC1_U5.3 R2_U5.1
pads on no net: IC1_U1.2 IC1_U1.12 IC1_U2.2 IC1_U2.12 IC1_U3.2 IC1_U3.12 IC1_U4.2 IC1_U4.12 IC1_U5.2 IC1_U5.12